# Altium PCB 180222.PcbDoc (part 5 of 5)
Units mil, origin at the board's own origin, x right, y up, seen from the top; angles counter-clockwise.
Board outline 6880.23 x 4505.03 mil, 2 copper layers (Top Layer, Bottom Layer); 136 components, 176 nets, 656 pads, 225 vias.
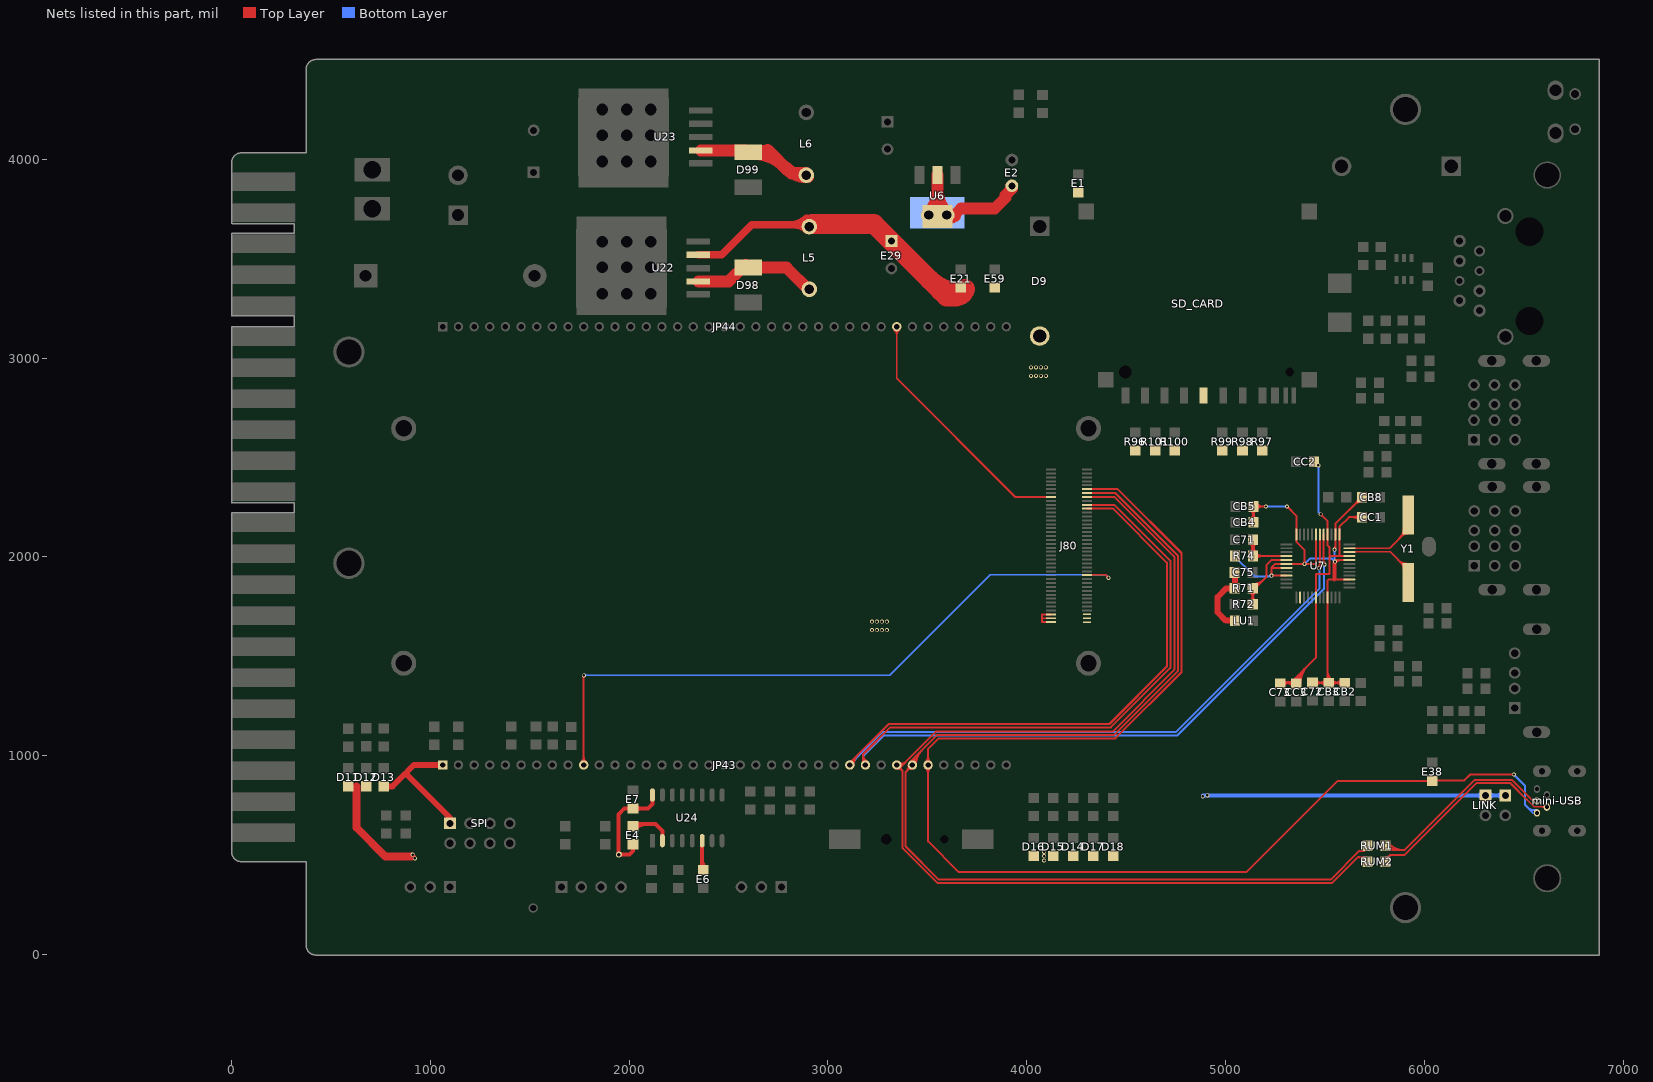
[diagram p5: the nets of this part, all layers, seen from the top]

## Via types
v1: diameter 20, hole 12, Top Layer to Bottom Layer, 169 vias
v2: diameter 30, hole 18, Top Layer to Bottom Layer, 30 vias
v3: diameter 35, hole 20, Top Layer to Bottom Layer, 25 vias
v4: diameter 50, hole 28, Top Layer to Bottom Layer, 1 vias

## Nets (pads, with @x,y where several pads share a name; then routed paths per layer and width w, separated by ;. In a path a pad name is that pad's centre, name@x,y a point inside that pad or via, vN(x,y) a via of type N, cw(c..) or ccw(c..) an arc to the next point about the centre after c; other vN are vias at no path point) (continued)
TDO: J80.13 JP43.10 | length 3880.1
  Top Layer w7: J80.13@4303.55,1910.36 4395.64,1910.36 4396,1910 4397,1910 v1(4412,1895) ; 4329.27,1909.36 ccw(c4329.27,1902.33) 4324.3,1907.3 cw(c4331.69,1899.91) 4331.69,1910.36 ; 4400.9,1906.1 cw(c4389.81,1895) 4405.5,1895 ccw(c4389.81,1895) 4400.9,1906.1 ; 4400.9,1906.1 ccw(c4412,1917.19) 4412,1901.5 cw(c4412,1917.19) 4400.9,1906.1
  Top Layer w10: v1@1769.22,1401.46 cw(c1762.38,1394.62) 1772.05,1394.62 ; JP43.10@1772.05,953.64 v1@1772.05,1406 ; 1772.05,1391.24 cw(c1786.52,1391.24) v1@1776.29,1401.46 ; JP43.10@1758.89,966.81 ccw(c1727.1,998.6) 1772.05,998.6 ; JP43.10@1758.89,966.81 ccw(c1727.1,998.6) 1772.05,998.6 ; JP43.10@1758.89,966.81 ccw(c1727.1,998.6) 1772.05,998.6 ; 1772.05,998.6 ccw(c1817.01,998.6) JP43.10@1785.22,966.81 ; 1772.05,998.6 ccw(c1817.01,998.6) JP43.10@1785.22,966.81 ; 1772.05,998.6 ccw(c1817.01,998.6) JP43.10@1785.22,966.81 ; v1@1767.78,1402.46 cw(c1757.46,1392.14) 1772.05,1392.14 ccw(c1757.46,1392.14) v1@1767.78,1402.46 ; v1@1772.05,1395.72 cw(c1781.6,1395.72) 1774.85,1402.46 ccw(c1781.6,1395.72) v1@1772.05,1395.72
  Bottom Layer w7: v1@1771.76,1402 1772.76,1401 v1@1776.76,1405 ; v1@1772.05,1406 3311,1406 3816,1911 4398,1911 4407,1902 v1@4407,1899 ; v1@1777.35,1400.4 cw(c1790.86,1386.89) 1790.86,1406 ; v1@1777.35,1409.6 ccw(c1786.03,1418.28) 1786.03,1406 ; 1787.01,1406 cw(c1787.01,1421.69) 1775.91,1410.6 ccw(c1787.01,1421.69) 1787.01,1406 ; 1787.01,1406 ccw(c1787.01,1390.31) 1775.91,1401.4 cw(c1787.01,1390.31) 1787.01,1406 ; 4399.49,1909.51 cw(c4384.98,1895) 4405.5,1895 ccw(c4384.98,1895) 4399.49,1909.51 ; 4404.32,1904.68 ccw(c4412,1912.36) 4412,1901.5 cw(c4412,1912.36) 4404.32,1904.68
  other v1: 1772.76,1405
TESTJ: U7.2
TMS: J80.48 JP44.30 | length 1663.4
  Top Layer w7: 3346.86,2898.14 JP44.30@3346.86,3149 ; J80.48@4122.39,2302 J80.48@4122.45,2302.06 ; JP44.30@3332.63,3144.13 cw(c3298.28,3109.78) 3346.86,3109.78 ; JP44.30@3332.63,3144.13 cw(c3298.28,3109.78) 3346.86,3109.78 ; JP44.30@3332.63,3144.13 cw(c3298.28,3109.78) 3346.86,3109.78 ; JP44.30@3337.58,3149.08 cw(c3315.18,3126.68) 3346.86,3126.68 ; JP44.30@3337.58,3149.08 cw(c3315.18,3126.68) 3346.86,3126.68 ; JP44.30@3337.58,3149.08 cw(c3315.18,3126.68) 3346.86,3126.68 ; 3346.86,3109.78 cw(c3395.44,3109.78) JP44.30@3361.09,3144.13 ; 3346.86,3109.78 cw(c3395.44,3109.78) JP44.30@3361.09,3144.13 ; 3346.86,3109.78 cw(c3395.44,3109.78) JP44.30@3361.09,3144.13 ; 3346.86,3126.68 cw(c3378.54,3126.68) JP44.30@3356.14,3149.08 ; 3346.86,3126.68 cw(c3378.54,3126.68) JP44.30@3356.14,3149.08 ; 3346.86,3126.68 cw(c3378.54,3126.68) JP44.30@3356.14,3149.08 ; 4096.58,2301 ccw(c4096.58,2308.25) 4101.7,2303.12 cw(c4096.58,2308.25) 4096.58,2301
  Top Layer w10: 3346.86,2898.14 3944,2301 J80.48@4122.39,2301
U22_2: D98.2 L5.2 U22.2 | length 621.2
  Top Layer w59.06: U22.2@2349.3,3386.07 2502.07,3386.07 D98.2@2586,3470 ; D98.2@2600,3456.22 2791.78,3456.22 L5.2@2903.5,3344.5
U23_2: D99.2 L6.2 U23.2 | length 1996.6
  Top Layer w59.06: U23.2@2360.3,4045.07 2586.93,4045.07 2588,4044 2697,4044 ; D99.2@2633.66,4027.29 cw(c2672.2,3943.95) 2737.12,4008.88 ; 2697,4049 2817,3929 ; 2783.02,3957.98 ccw(c2900,4074.97) L6.2@2900,3909.53 ; 2783.02,3965.98 ccw(c2900,4082.97) L6.2@2900,3917.53 ; 2783.33,3962.67 ccw(c2629.53,3808.87) D99.2@2629.53,4026.38 ; 2817,3931 L6.2@2892,3931 ; 2844.19,3931 cw(c2844.19,3873.23) L6.2@2885.04,3914.08 ; L6.2@2862,3920 L6.2@2901,3920 ; 2525.34,4045.07 cw(c2525.34,3991.09) D99.2@2563.51,4029.26 ; 2525.34,4045.07 cw(c2525.34,3991.09) D99.2@2563.51,4029.26 ; 2525.34,4045.07 cw(c2525.34,3991.09) D99.2@2563.51,4029.26 ; D99.2@2629.53,4026.38 cw(c2629.53,3820.94) 2774.79,3966.21 ccw(c2629.53,3820.94) D99.2@2629.53,4026.38 ; D99.2@2636.49,4029.26 cw(c2672.07,3993.68) 2672.07,4044 ; D99.2@2636.49,4029.26 cw(c2672.07,3993.68) 2672.07,4044 ; D99.2@2636.49,4029.26 cw(c2672.07,3993.68) 2672.07,4044 ; D99.2@2633.2,4027.09 cw(c2668.24,3939.99) 2734.62,4006.38 ccw(c2668.24,3939.99) D99.2@2633.2,4027.09
USB_5V: 
USBD_DN: J80.33 JP43.30 RUM2.2 | length 6130.5
  Top Layer w7: JP43.30@3345,952 3348.49,952 JP43.30@3346.86,953.64
  Top Layer w10: J80.33@4303.55,2302.06 4360.91,2302.06 4360.97,2302 4441,2302 4745,1998 4745,1434.25 4432.75,1122 3543.58,1122 3389.97,968.39 3389.97,966.98 ; 5666.23,489.77 5535.96,359.5 3552.09,359.5 3375,536.59 3375,925.49 ; 5678.65,490 cw(c5678.65,463.48) RUM2.2@5704.88,467.41 ; RUM2.2@5690.27,490 cw(c5690.27,465.22) RUM2.2@5714.77,468.9 ; RUM2.2@5694.99,465.93 ccw(c5667.04,461.74) 5667.04,490 5704,490 RUM2.2@5705,489 ; JP43.30@3363.33,944.96 cw(c3374.99,938.82) 3374.99,952 ; JP43.30@3363.33,944.96 cw(c3374.99,938.82) 3374.99,952 ; JP43.30@3363.33,944.96 cw(c3374.99,938.82) 3374.99,952 ; JP43.30@3364.52,959.54 ccw(c3375,963.05) 3375,952 ; JP43.30@3364.52,959.54 ccw(c3375,963.05) 3375,952 ; JP43.30@3364.52,959.54 ccw(c3375,963.05) 3375,952 ; 3375,925.5 cw(c3398.49,948.98) 3365.4,951.97 ccw(c3398.49,948.98) 3375,925.5 ; 3375,925.5 ccw(c3351.51,902.01) 3348.53,935.09 cw(c3351.51,902.01) 3375,925.5 ; 3375,925.49 3348.49,952 3375,952 ; 3375,952 3389.97,966.98 ; 3389.97,966.98 cw(c3374.91,982.04) 3359.94,966.89 ccw(c3374.91,982.04) 3389.97,966.98 ; JP43.30@3345.89,952.66 ccw(c3360.77,967.72) 3375.74,952.75 cw(c3360.77,967.72) JP43.30@3345.89,952.66 ; JP43.30@3352.92,959.77 ccw(c3367.84,974.88) 3382.86,959.86 cw(c3367.84,974.88) JP43.30@3352.92,959.77
USBD_DN1: mini-USB.2 RUM2.1 | length 1216.2
  Top Layer w8: 6519,777 6553,743 mini-USB.2@6613,743 ; 6588.64,743 cw(c6588.64,714.64) 6608.69,734.69 ccw(c6588.64,714.64) 6588.64,743 ; 6588.64,743 ccw(c6588.64,771.36) 6608.69,751.31 cw(c6588.64,771.36) 6588.64,743
  Top Layer w10: RUM2.1@5816,489 5827,500 ; 6516.86,779.14 6434,862 6262,862 5900,500 5827,500 ; RUM2.1@5805.91,489.57 ccw(c5805.91,515.33) 5824.12,497.12 ; RUM2.1@5805.91,489.57 ccw(c5805.91,515.33) 5824.12,497.12 ; RUM2.1@5805.91,489.57 ccw(c5805.91,515.33) 5824.12,497.12 ; RUM2.1@5823.97,478.87 cw(c5839.59,487.41) 5827,500 ; RUM2.1@5823.97,478.87 cw(c5839.59,487.41) 5827,500 ; RUM2.1@5823.97,478.87 cw(c5839.59,487.41) 5827,500
USBD_DP: J80.34 JP43.31 RUM1.2 | length 5959.2
  Top Layer w7: JP43.31@3424,951 JP43.31@3424,952.04 ; JP43.31@3424,953.64 JP43.31@3424,952.04 ; JP43.31@3425.6,953.64 JP43.31@3424,952.04
  Top Layer w10: JP43.31@3414.22,953.64 cw(c3450.33,953.64) 3424.8,979.17 ; JP43.31@3424.22,953.64 cw(c3484.47,953.64) 3441.87,996.24 ; JP43.31@3425,952 3424,951 3393,920 3393,919 3392,918 3392,543.63 3559.13,376.5 3560.13,377.5 5529.5,377.5 5674,522 5684,522 ; 3425,979.38 3550.62,1105 4439.79,1105 4762,1427.21 4762,2005.04 4445.29,2321.75 J80.34@4303.55,2321.75 ; JP43.31@3425.6,953.64 3425.6,977.6 3426.19,978.19 ; JP43.31@3434.22,953.64 cw(c3518.61,953.64) 3458.94,1013.31 ; JP43.31@3444.22,953.64 cw(c3552.76,953.64) 3476.01,1030.39 ; 5675,522 5697,522 RUM1.2@5702,527 ; 3393.52,920.52 ccw(c3361.04,953.01) 3406.98,953.46 cw(c3361.04,953.01) 3393.52,920.52 ; 3395.58,922.58 cw(c3425.6,892.57) 3425.6,935.02 ccw(c3425.6,892.57) 3395.58,922.58
USBD_DP1: mini-USB.3 RUM1.1 | length 1220.5
  Top Layer w10: RUM1.1@5798.83,540.81 ccw(c5833.74,571.45) 5833.74,525 ; RUM1.1@5806.35,547.4 ccw(c5855.83,590.83) 5855.83,525 ; RUM1.1@5813.87,554 ccw(c5877.91,610.22) 5877.91,525 ; RUM1.1@5821,525 5900,525 ; RUM1.1@5821.38,560.6 ccw(c5899.99,629.6) 5899.99,525 ; 6080,705 5900,525 ; 6080,705.41 6253.59,879 6441.04,879 6546.04,774 mini-USB.3@6565,774 ; 6545.63,774 ccw(c6545.63,789.87) mini-USB.3@6558.37,780.41 ; 6545.63,775 cw(c6545.63,759.13) mini-USB.3@6558.37,768.59
USBD_VBUS: E38.1 J80.35 JP43.32 mini-USB.1 | length 7024.8
  Top Layer w7: JP43.32@3503,950 JP43.32@3503,953.64 ; J80.35@4303.55,2340.43 J80.35@4304,2340.43
  Top Layer w10: J80.35@4304,2341 4458,2341 4779,2020 4779,1420.17 4446.83,1088 3557.66,1088 3504.34,1034.67 JP43.32@3504.34,953.64 3504.34,569.66 3659,415 5105,415 5564.09,874.09 E38.1@6040,874.09 ; E38.1@6046,876 6202,876 6232,906 v1(6451,906) ; JP43.32@3491.17,940.47 cw(c3459.38,908.68) 3504.34,908.68 ; JP43.32@3491.17,940.47 cw(c3459.38,908.68) 3504.34,908.68 ; JP43.32@3491.17,940.47 cw(c3459.38,908.68) 3504.34,908.68 ; JP43.32@3491.17,966.81 ccw(c3459.38,998.6) 3504.34,998.6 ; JP43.32@3491.17,966.81 ccw(c3459.38,998.6) 3504.34,998.6 ; JP43.32@3491.17,966.81 ccw(c3459.38,998.6) 3504.34,998.6 ; 3504.34,908.68 cw(c3549.29,908.68) JP43.32@3517.5,940.47 ; 3504.34,908.68 cw(c3549.29,908.68) JP43.32@3517.5,940.47 ; 3504.34,908.68 cw(c3549.29,908.68) JP43.32@3517.5,940.47 ; 3504.34,998.6 ccw(c3549.29,998.6) JP43.32@3517.5,966.81 ; 3504.34,998.6 ccw(c3549.29,998.6) JP43.32@3517.5,966.81 ; 3504.34,998.6 ccw(c3549.29,998.6) JP43.32@3517.5,966.81
  Bottom Layer w10: v1(6451,906) 6507,850 6507,753 6547,713 ; 6518.97,741.03 ccw(c6554.38,776.44) mini-USB.1@6564.77,727.45
USBH_DN: J80.31 JP43.28 U7.29 | length 6142.1
  Top Layer w7: JP43.28@3186.37,950.63 JP43.28@3187,950 ; J80.31@4303.55,2262.69 J80.31@4304.24,2262
  Top Layer w10: 3177,989.36 ccw(c3209.26,989.36) JP43.28@3193.57,961.17 ; JP43.28@3187,951 3177,961 3177,1006.37 ; JP43.28@3198.43,969.91 cw(c3218.73,1006.37) 3177,1006.37 ; 4373.31,2262.69 J80.31@4303.55,2262.69 4441.31,2262.69 4723,1981 4723,1442 4424,1143 3313.63,1143 3177,1006.37 ; v1@5494.41,1962.41 U7.29@5494.41,2113.81 ; 5494.41,1984.14 ccw(c5520.14,1984.14) 5501.94,1965.94 cw(c5520.14,1984.14) 5494.41,1984.14
  Bottom Layer w7: JP43.28@3183.36,953.64 JP43.28@3189.38,953.64 ; v1@5493,1960 v1@5493,1962.41
  Bottom Layer w10: 3177,983.26 ccw(c3199.78,983.26) JP43.28@3192.23,961.77 ; JP43.28@3189.38,953.64 3177,966.01 3177,997.37 ; JP43.28@3195.54,971.21 cw(c3204.73,997.37) 3177,997.37 ; v1@5496,1960 5496,1840.96 4756.54,1101.5 3281.13,1101.5 3177,997.37 ; 5496,1944.52 cw(c5516.3,1944.52) 5501.94,1958.87 ccw(c5516.3,1944.52) 5496,1944.52
  other v1: 5498.41,1962.41
USBH_DP: J80.30 JP43.27 U7.30 | length 6518.6
  Top Layer w10: JP43.27@3110,953 3110,963.88 3306.12,1160 4416.96,1160 4706,1449.04 4706,1972 4434.99,2243.01 J80.30@4303.55,2243.01 ; v1@5474.72,1944 U7.30@5474.72,2113.81 ; JP43.27@3110.64,972.26 ccw(c3110.64,992.08) 3124.65,978.06 ; JP43.27@3110.64,972.26 ccw(c3110.64,992.08) 3124.65,978.06 ; JP43.27@3110.64,972.26 ccw(c3110.64,992.08) 3124.65,978.06 ; JP43.27@3119.26,953.64 cw(c3165.21,953.64) 3132.72,986.13 ; JP43.27@3119.26,953.64 cw(c3165.21,953.64) 3132.72,986.13 ; JP43.27@3119.26,953.64 cw(c3165.21,953.64) 3132.72,986.13 ; JP43.27@3129.26,953.64 cw(c3199.35,953.64) 3149.79,1003.2 ; JP43.27@3129.26,953.64 cw(c3199.35,953.64) 3149.79,1003.2 ; JP43.27@3129.26,953.64 cw(c3199.35,953.64) 3149.79,1003.2 ; v1@5467.35,1947.54 ccw(c5449.53,1965.35) 5474.72,1965.35 cw(c5449.53,1965.35) v1@5467.35,1947.54
  Bottom Layer w10: JP43.27@3110.64,953.64 3110.64,955.52 3273.62,1118.5 4749.5,1118.5 5474,1843 5474,1945 v1@5473,1946 ; JP43.27@3110.64,972.26 ccw(c3110.64,1012.67) 3139.21,984.1 ; JP43.27@3110.64,972.26 ccw(c3110.64,1012.67) 3139.21,984.1 ; JP43.27@3110.64,972.26 ccw(c3110.64,1012.67) 3139.21,984.1 ; JP43.27@3119.26,953.64 cw(c3144.62,953.64) 3126.69,971.57 ; JP43.27@3119.26,953.64 cw(c3144.62,953.64) 3126.69,971.57 ; JP43.27@3119.26,953.64 cw(c3144.62,953.64) 3126.69,971.57 ; JP43.27@3129.26,953.64 cw(c3178.76,953.64) 3143.76,988.64 ; JP43.27@3129.26,953.64 cw(c3178.76,953.64) 3143.76,988.64 ; JP43.27@3129.26,953.64 cw(c3178.76,953.64) 3143.76,988.64 ; v1@5467.35,1940.46 cw(c5451.28,1924.4) 5474,1924.4 ccw(c5451.28,1924.4) v1@5467.35,1940.46
  other v1: 5470.88,1944
V18: C73.1 CC1.1 CC2.1 CC3.1 U7.6 U7.21 U7.25 U7.28 | length 3501.6
  Top Layer w10: C73.1@5280,1370 CC3.1@5331,1370 ; v1(5479,2215) 5514.09,2179.91 U7.28@5514.09,2113.81 5514.09,2058.91 5523,2050 5523,2003 ; 5523,2004.56 5523,2003 ; 5573.15,2005.71 U7.25@5573.15,2113.81 5573.15,2151.15 5622,2200 CC1.1@5687.09,2200 ; U7.21@5623.35,2004.56 5524.56,2004.56 5523,2003 ; C73.1@5285.4,1357.47 cw(c5310.76,1338.07) 5310.76,1370 ; C73.1@5285.4,1357.47 cw(c5310.76,1338.07) 5310.76,1370 ; C73.1@5285.4,1357.47 cw(c5310.76,1338.07) 5310.76,1370 ; C73.1@5290.59,1370 cw(c5290.59,1299.48) CC3.1@5340.46,1349.35 ; C73.1@5290.59,1370 cw(c5290.59,1299.48) CC3.1@5340.46,1349.35 ; C73.1@5290.59,1370 cw(c5290.59,1299.48) CC3.1@5340.46,1349.35 ; C73.1@5291.54,1378.47 ccw(c5311.98,1398.9) 5311.98,1370 ; C73.1@5291.54,1378.47 ccw(c5311.98,1398.9) 5311.98,1370 ; C73.1@5291.54,1378.47 ccw(c5311.98,1398.9) 5311.98,1370 ; C73.1@5293.34,1351.39 cw(c5331,1322.59) CC3.1@5331,1370 ; C73.1@5293.34,1351.39 cw(c5331,1322.59) CC3.1@5331,1370 ; C73.1@5293.34,1351.39 cw(c5331,1322.59) CC3.1@5331,1370 ; 5314.74,1370 cw(c5314.74,1323.63) CC3.1@5347.53,1356.42 ; 5314.74,1370 cw(c5314.74,1323.63) CC3.1@5347.53,1356.42 ; 5314.74,1370 cw(c5314.74,1323.63) CC3.1@5347.53,1356.42 ; 5320.02,1370 ccw(c5320.02,1398.9) CC3.1@5340.46,1378.47 ; 5320.02,1370 ccw(c5320.02,1398.9) CC3.1@5340.46,1378.47 ; 5320.02,1370 ccw(c5320.02,1398.9) CC3.1@5340.46,1378.47 ; CC3.1@5331,1370 5455.04,1494.04 U7.6@5455.04,1796.89 5455.04,1914 5523,1914 5523,2003 ; CC3.1@5347.58,1363.91 cw(c5402.3,1363.91) 5363.61,1402.61 ; CC3.1@5347.58,1363.91 cw(c5402.3,1363.91) 5363.61,1402.61 ; CC3.1@5347.58,1363.91 cw(c5402.3,1363.91) 5363.61,1402.61 ; CC3.1@5357.58,1363.91 cw(c5436.45,1363.91) 5380.68,1419.68 ; CC3.1@5357.58,1363.91 cw(c5436.45,1363.91) 5380.68,1419.68 ; CC3.1@5357.58,1363.91 cw(c5436.45,1363.91) 5380.68,1419.68 ; CC3.1@5367.58,1363.91 cw(c5470.59,1363.91) 5397.75,1436.75 ; CC3.1@5367.58,1363.91 cw(c5470.59,1363.91) 5397.75,1436.75 ; CC3.1@5367.58,1363.91 cw(c5470.59,1363.91) 5397.75,1436.75 ; CC3.1@5377.58,1363.91 cw(c5504.73,1363.91) 5414.82,1453.82 ; CC3.1@5377.58,1363.91 cw(c5504.73,1363.91) 5414.82,1453.82 ; CC3.1@5377.58,1363.91 cw(c5504.73,1363.91) 5414.82,1453.82 ; v1@5479,2210 cw(c5479,2197.93) 5487.54,2206.46 ; v1@5479,2210 cw(c5479,2197.93) 5487.54,2206.46 ; v1@5479,2210 cw(c5479,2197.93) 5487.54,2206.46 ; v1@5484,2215 ccw(c5496.07,2215) 5487.54,2206.46 ; v1@5484,2215 ccw(c5496.07,2215) 5487.54,2206.46 ; v1@5484,2215 ccw(c5496.07,2215) 5487.54,2206.46 ; 5637.38,2200 cw(c5637.38,2150.29) CC1.1@5672.53,2185.44 ; 5637.38,2200 ccw(c5637.38,2249.71) CC1.1@5672.53,2214.56 ; 5637.38,2200 cw(c5637.38,2150.29) CC1.1@5672.53,2185.44 ; 5637.38,2200 ccw(c5637.38,2249.71) CC1.1@5672.53,2214.56 ; 5637.38,2200 ccw(c5637.38,2249.71) CC1.1@5672.53,2214.56 ; 5637.38,2200 cw(c5637.38,2150.29) CC1.1@5672.53,2185.44
  Bottom Layer w10: v1(5467.91,2461.09) 5467.91,2226.09 v1(5479,2215) ; v1@5464.37,2457.56 cw(c5455.83,2449.02) 5467.91,2449.02 ; v1@5464.37,2457.56 cw(c5455.83,2449.02) 5467.91,2449.02 ; v1@5464.37,2457.56 cw(c5455.83,2449.02) 5467.91,2449.02 ; 5467.91,2449.02 cw(c5479.98,2449.02) v1@5471.44,2457.56 ; 5467.91,2449.02 cw(c5479.98,2449.02) v1@5471.44,2457.56 ; 5467.91,2449.02 cw(c5479.98,2449.02) v1@5471.44,2457.56
V33: C72.1 CB2.1 CB3.1 CB4.1 CB5.1 CB8.1 R74.2 U7.9 U7.15 U7.20 U7.26 U7.31 U7.36 U7.42 U7.43 U7.45 | length 6238.2
  Top Layer w10: v1(5043,2006) 5033.04,2006 5033.04,2005 R74.2@5048.35,2005 ; CB4.1@5140.91,2174 CB5.1@5140.91,2254 v1(5203,2254) ; U7.43@5293,1945 5234,1945 5232,1947 ; U7.45@5306.42,1906.14 v1(5232,1906.14) 5232,1947 ; v1(5310,2254) 5356.61,2207.39 U7.36@5356.61,2113.81 5356.61,2076.39 5398,2035 v1(5398,1965.19) ; C72.1@5438,1367.91 CB2.1@5599,1367.91 ; U7.31@5455.04,2113.81 5455.04,1965.19 v1(5398,1965.19) ; CB3.1@5514.09,1367 U7.9@5514.09,1796.89 5514.09,1883 5517.55,1886.45 5547.45,1886.45 ; 5548,1886.45 5550.45,1886.45 ; v1@5548,1973 v1(5551.12,1976.12) 5559.88,1984.88 U7.20@5623.35,1984.88 ; v1@5548,2037.07 5553.46,2042.54 U7.26@5553.46,2113.81 5553.46,2166.37 CB8.1@5687.09,2300 ; 5550,1886 5550.45,1886.45 ; U7.15@5623.35,1886.45 5550.45,1886.45 ; CB4.1@5126.35,2189.54 ccw(c5091.2,2224.69) 5140.91,2224.69 ; CB4.1@5126.35,2189.54 ccw(c5091.2,2224.69) 5140.91,2224.69 ; CB4.1@5126.35,2189.54 ccw(c5091.2,2224.69) 5140.91,2224.69 ; CB5.1@5126.35,2238.46 cw(c5091.2,2203.3) 5140.91,2203.3 ; CB5.1@5126.35,2238.46 cw(c5091.2,2203.3) 5140.91,2203.3 ; CB5.1@5126.35,2238.46 cw(c5091.2,2203.3) 5140.91,2203.3 ; 5140.91,2203.3 cw(c5190.62,2203.3) CB5.1@5155.47,2238.46 ; 5140.91,2203.3 cw(c5190.62,2203.3) CB5.1@5155.47,2238.46 ; 5140.91,2203.3 cw(c5190.62,2203.3) CB5.1@5155.47,2238.46 ; 5140.91,2224.69 ccw(c5190.62,2224.69) CB4.1@5155.47,2189.54 ; 5140.91,2224.69 ccw(c5190.62,2224.69) CB4.1@5155.47,2189.54 ; 5140.91,2224.69 ccw(c5190.62,2224.69) CB4.1@5155.47,2189.54 ; CB5.1@5155.47,2239.44 cw(c5190.62,2204.29) 5190.62,2254 ; CB5.1@5155.47,2239.44 cw(c5190.62,2204.29) 5190.62,2254 ; CB5.1@5155.47,2239.44 cw(c5190.62,2204.29) 5190.62,2254 ; CB5.1@5155.47,2268.56 ccw(c5190.62,2303.71) 5190.62,2254 ; CB5.1@5155.47,2268.56 ccw(c5190.62,2303.71) 5190.62,2254 ; CB5.1@5155.47,2268.56 ccw(c5190.62,2303.71) 5190.62,2254 ; 5190.93,2254 cw(c5190.93,2241.93) v1@5199.46,2250.46 ; 5190.93,2254 ccw(c5190.93,2266.07) v1@5199.46,2257.54 ; 5190.93,2254 cw(c5190.93,2241.93) v1@5199.46,2250.46 ; 5190.93,2254 ccw(c5190.93,2266.07) v1@5199.46,2257.54 ; 5190.93,2254 ccw(c5190.93,2266.07) v1@5199.46,2257.54 ; 5190.93,2254 cw(c5190.93,2241.93) v1@5199.46,2250.46 ; 5232,1918.21 cw(c5219.93,1918.21) 5228.46,1909.67 ccw(c5219.93,1918.21) 5232,1918.21 ; 5232,1918.21 ccw(c5244.07,1918.21) v1@5235.54,1909.67 ; 5232,1918.21 ccw(c5244.07,1918.21) v1@5235.54,1909.67 ; 5232,1947 5250.19,1965.19 U7.42@5306.42,1965.19 v1(5398,1965.19) ; v1@5235.54,1902.6 cw(c5244.07,1894.07) 5244.07,1906.14 ; v1@5235.54,1902.6 cw(c5244.07,1894.07) 5244.07,1906.14 ; v1@5235.54,1902.6 cw(c5244.07,1894.07) 5244.07,1906.14 ; v1@5235.54,1909.67 ccw(c5244.07,1918.21) 5244.07,1906.14 ; v1@5235.54,1909.67 ccw(c5244.07,1918.21) 5244.07,1906.14 ; v1@5235.54,1909.67 ccw(c5244.07,1918.21) 5244.07,1906.14 ; v1@5310,2249 cw(c5310,2236.93) 5318.54,2245.46 ; v1@5310,2249 cw(c5310,2236.93) 5318.54,2245.46 ; v1@5310,2249 cw(c5310,2236.93) 5318.54,2245.46 ; v1@5315,2254 ccw(c5327.07,2254) 5318.54,2245.46 ; v1@5315,2254 ccw(c5327.07,2254) 5318.54,2245.46 ; v1@5315,2254 ccw(c5327.07,2254) 5318.54,2245.46 ; 5385.93,1965.19 cw(c5385.93,1953.12) v1@5394.46,1961.66 ; 5385.93,1965.19 ccw(c5385.93,1977.26) v1@5394.46,1968.73 ; 5385.93,1965.19 cw(c5385.93,1953.12) v1@5394.46,1961.66 ; 5385.93,1965.19 ccw(c5385.93,1977.26) v1@5394.46,1968.73 ; 5385.93,1965.19 ccw(c5385.93,1977.26) v1@5394.46,1968.73 ; 5385.93,1965.19 cw(c5385.93,1953.12) v1@5394.46,1961.66 ; v1@5394.46,1968.73 ccw(c5385.93,1977.26) 5398,1977.26 ; v1@5394.46,1968.73 ccw(c5385.93,1977.26) 5398,1977.26 ; v1@5394.46,1968.73 ccw(c5385.93,1977.26) 5398,1977.26 ; 5398,1977.26 ccw(c5410.07,1977.26) v1@5401.54,1968.73 ; 5398,1977.26 ccw(c5410.07,1977.26) v1@5401.54,1968.73 ; 5398,1977.26 ccw(c5410.07,1977.26) v1@5401.54,1968.73 ; v1@5401.54,1961.66 cw(c5410.07,1953.12) 5410.07,1965.19 ; v1@5401.54,1961.66 cw(c5410.07,1953.12) 5410.07,1965.19 ; v1@5401.54,1961.66 cw(c5410.07,1953.12) 5410.07,1965.19 ; v1@5401.54,1968.73 ccw(c5410.07,1977.26) 5410.07,1965.19 ; v1@5401.54,1968.73 ccw(c5410.07,1977.26) 5410.07,1965.19 ; v1@5401.54,1968.73 ccw(c5410.07,1977.26) 5410.07,1965.19 ; C72.1@5453.54,1353.35 cw(c5488.69,1318.2) 5488.69,1367.91 ; C72.1@5453.54,1353.35 cw(c5488.69,1318.2) 5488.69,1367.91 ; C72.1@5453.54,1353.35 cw(c5488.69,1318.2) 5488.69,1367.91 ; C72.1@5453.54,1382.47 ccw(c5488.69,1417.62) 5488.69,1367.91 ; C72.1@5453.54,1382.47 ccw(c5488.69,1417.62) 5488.69,1367.91 ; C72.1@5453.54,1382.47 ccw(c5488.69,1417.62) 5488.69,1367.91 ; 5466.89,1367.91 cw(c5466.89,1314.78) CB3.1@5504.46,1352.35 ; 5466.89,1367.91 cw(c5466.89,1314.78) CB3.1@5504.46,1352.35 ; 5466.89,1367.91 cw(c5466.89,1314.78) CB3.1@5504.46,1352.35 ; 5471.72,1367.91 ccw(c5471.72,1414.2) CB3.1@5504.46,1381.47 ; 5471.72,1367.91 ccw(c5471.72,1414.2) CB3.1@5504.46,1381.47 ; 5471.72,1367.91 ccw(c5471.72,1414.2) CB3.1@5504.46,1381.47 ; 5491.03,1367.91 cw(c5491.03,1338.92) CB3.1@5511.53,1359.42 ; 5491.03,1367.91 cw(c5491.03,1338.92) CB3.1@5511.53,1359.42 ; 5491.03,1367.91 cw(c5491.03,1338.92) CB3.1@5511.53,1359.42 ; CB3.1@5504.46,1381.47 ccw(c5481.19,1404.73) 5514.09,1404.73 ; CB3.1@5504.46,1381.47 ccw(c5481.19,1404.73) 5514.09,1404.73 ; CB3.1@5504.46,1381.47 ccw(c5481.19,1404.73) 5514.09,1404.73 ; 5514.09,1404.36 ccw(c5556.47,1404.36) CB3.1@5526.51,1374.39 ; 5514.09,1404.36 ccw(c5556.47,1404.36) CB3.1@5526.51,1374.39 ; 5514.09,1404.36 ccw(c5556.47,1404.36) CB3.1@5526.51,1374.39 ; 5514.09,1428.5 ccw(c5580.61,1428.5) CB3.1@5533.58,1381.47 ; 5514.09,1428.5 ccw(c5580.61,1428.5) CB3.1@5533.58,1381.47 ; 5514.09,1428.5 ccw(c5580.61,1428.5) CB3.1@5533.58,1381.47 ; CB3.1@5528.47,1359.42 cw(c5548.97,1338.92) 5548.97,1367.91 ; CB3.1@5528.47,1359.42 cw(c5548.97,1338.92) 5548.97,1367.91 ; CB3.1@5528.47,1359.42 cw(c5548.97,1338.92) 5548.97,1367.91 ; CB3.1@5535.54,1352.35 cw(c5573.11,1314.78) 5573.11,1367.91 ; CB3.1@5535.54,1352.35 cw(c5573.11,1314.78) 5573.11,1367.91 ; CB3.1@5535.54,1352.35 cw(c5573.11,1314.78) 5573.11,1367.91 ; CB3.1@5535.54,1381.47 ccw(c5568.28,1414.2) 5568.28,1367.91 ; CB3.1@5535.54,1381.47 ccw(c5568.28,1414.2) 5568.28,1367.91 ; CB3.1@5535.54,1381.47 ccw(c5568.28,1414.2) 5568.28,1367.91 ; 5546.89,1367.91 cw(c5546.89,1314.78) CB2.1@5584.46,1352.35 ; 5546.89,1367.91 cw(c5546.89,1314.78) CB2.1@5584.46,1352.35 ; 5546.89,1367.91 cw(c5546.89,1314.78) CB2.1@5584.46,1352.35 ; 5551.72,1367.91 ccw(c5551.72,1414.2) CB2.1@5584.46,1381.47 ; 5551.72,1367.91 ccw(c5551.72,1414.2) CB2.1@5584.46,1381.47 ; 5551.72,1367.91 ccw(c5551.72,1414.2) CB2.1@5584.46,1381.47 ; 5571.03,1367.91 cw(c5571.03,1338.92) CB2.1@5591.53,1359.42 ; 5571.03,1367.91 cw(c5571.03,1338.92) CB2.1@5591.53,1359.42 ; 5571.03,1367.91 cw(c5571.03,1338.92) CB2.1@5591.53,1359.42 ; v1@5545.46,2040.61 ccw(c5526.15,2059.92) 5553.46,2059.92 cw(c5526.15,2059.92) v1@5545.46,2040.61 ; v1@5547.58,1979.66 cw(c5560.19,1967.05) 5560.19,1984.88 ccw(c5560.19,1967.05) v1@5547.58,1979.66 ; v1@5554.66,1972.58 cw(c5584.33,1942.9) 5584.33,1984.88 ccw(c5584.33,1942.9) v1@5554.66,1972.58 ; 5650.26,2263.17 cw(c5687.09,2226.34) 5687.09,2278.43 ccw(c5687.09,2226.34) 5650.26,2263.17 ; 5652.64,2265.55 ccw(c5619.17,2299.02) 5666.5,2299.02 cw(c5619.17,2299.02) 5652.64,2265.55 ; CB8.1@5667.33,2280.24 cw(c5687.09,2260.48) 5687.09,2288.43 ccw(c5687.09,2260.48) CB8.1@5667.33,2280.24
  Top Layer w20: 5547.45,1886.45 5549,1888 5549,1972 v1@5548,1973
  Bottom Layer w10: v1(5043,2006) 5147,1902 v1@5232,1902 ; v1(5203,2254) v1(5310,2254) ; v1(5398,1965.19) 5424.81,1992 5535.24,1992 v1@5549,1978.24 ; v1(5549,2037.07) v1@5549,1978.24 ; v1(5551.12,1976.12) v1@5549,1978.24 ; v1@5043,2001 cw(c5043,1988.93) 5051.54,1997.46 ; v1@5043,2001 cw(c5043,1988.93) 5051.54,1997.46 ; v1@5043,2001 cw(c5043,1988.93) 5051.54,1997.46 ; v1@5048,2006 ccw(c5060.07,2006) 5051.54,1997.46 ; v1@5048,2006 ccw(c5060.07,2006) 5051.54,1997.46 ; v1@5048,2006 ccw(c5060.07,2006) 5051.54,1997.46 ; v1@5206.54,2250.46 cw(c5215.07,2241.93) 5215.07,2254 ; v1@5206.54,2250.46 cw(c5215.07,2241.93) 5215.07,2254 ; v1@5206.54,2250.46 cw(c5215.07,2241.93) 5215.07,2254 ; v1@5206.54,2257.54 ccw(c5215.07,2266.07) 5215.07,2254 ; v1@5206.54,2257.54 ccw(c5215.07,2266.07) 5215.07,2254 ; v1@5206.54,2257.54 ccw(c5215.07,2266.07) 5215.07,2254 ; 5209.94,1902 ccw(c5209.94,1928.2) v1@5228.46,1909.67 ; 5209.94,1902 ccw(c5209.94,1928.2) v1@5228.46,1909.67 ; 5209.94,1902 ccw(c5209.94,1928.2) v1@5228.46,1909.67 ; 5297.93,2254 cw(c5297.93,2241.93) v1@5306.46,2250.46 ; 5297.93,2254 ccw(c5297.93,2266.07) v1@5306.46,2257.54 ; 5297.93,2254 cw(c5297.93,2241.93) v1@5306.46,2250.46 ; 5297.93,2254 ccw(c5297.93,2266.07) v1@5306.46,2257.54 ; 5297.93,2254 ccw(c5297.93,2266.07) v1@5306.46,2257.54 ; 5297.93,2254 cw(c5297.93,2241.93) v1@5306.46,2250.46 ; v1@5398,1970.19 ccw(c5398,1982.26) 5406.54,1973.73 ; v1@5398,1970.19 ccw(c5398,1982.26) 5406.54,1973.73 ; v1@5398,1970.19 ccw(c5398,1982.26) 5406.54,1973.73 ; v1@5403,1965.19 cw(c5415.07,1965.19) 5406.54,1973.73 ; v1@5403,1965.19 cw(c5415.07,1965.19) 5406.54,1973.73 ; v1@5403,1965.19 cw(c5415.07,1965.19) 5406.54,1973.73 ; 5542.58,1984.66 cw(c5534.05,1976.12) v1@5546.12,1976.12 ; 5542.58,1984.66 ccw(c5551.12,1993.19) v1@5551.12,1981.12 ; 5542.58,1984.66 cw(c5534.05,1976.12) v1@5546.12,1976.12 ; 5542.58,1984.66 ccw(c5551.12,1993.19) v1@5551.12,1981.12 ; 5542.58,1984.66 ccw(c5551.12,1993.19) v1@5551.12,1981.12 ; 5542.58,1984.66 cw(c5534.05,1976.12) v1@5546.12,1976.12 ; v1@5545.46,2033.54 cw(c5536.93,2025) 5549,2025 ; v1@5545.46,2033.54 cw(c5536.93,2025) 5549,2025 ; v1@5545.46,2033.54 cw(c5536.93,2025) 5549,2025 ; 5549,1993.31 ccw(c5568.31,1993.31) v1@5554.66,1979.66 ; 5549,1993.31 ccw(c5568.31,1993.31) v1@5554.66,1979.66 ; 5549,1993.31 ccw(c5568.31,1993.31) v1@5554.66,1979.66 ; 5549,2025 cw(c5561.07,2025) v1@5552.54,2033.54 ; 5549,2025 cw(c5561.07,2025) v1@5552.54,2033.54 ; 5549,2025 cw(c5561.07,2025) v1@5552.54,2033.54
V+: E4.1 U24.2 | length 288.1
  Top Layer w20: E4.1@2027.55,637.45 2047.09,657 ; E4.1@2031.97,656.97 ccw(c2039.52,664.58) 2047.09,657 ; E4.1@2032.01,634.88 cw(c2085.41,581.48) 2085.41,657 ; U24.2@2168,573 2168,622 2133,657 2047.09,657
V-: E6.1 U24.6 | length 201.2
  Top Layer w20: E6.1@2361.99,435.93 ccw(c2347.49,450.43) E6.1@2368,450.43 ; E6.1@2368,430.91 U24.6@2368,573 ; 2368,474.66 ccw(c2422.77,474.66) E6.1@2384.04,435.93
VBUS: C75.1 LU1.2 R71.2 | length 438.2
  Top Layer w30: C75.1@5046.09,1922 5047.35,1920.74 R71.2@5047.35,1842 5004,1842 4960,1798 4960,1722 5002,1680 LU1.2@5048.35,1680 ; C75.1@5038.61,1913.53 cw(c5017.48,1892.41) 5047.35,1892.41 ; C75.1@5038.61,1913.53 cw(c5017.48,1892.41) 5047.35,1892.41 ; C75.1@5038.61,1913.53 cw(c5017.48,1892.41) 5047.35,1892.41
VBUSM: R71.1 R72.1 U7.41 | length 1156.3
  Top Layer w10: R72.1@5137.91,1762 5137.91,1830.91 5206,1899 5206,1959 5231,1984 ; 5231,1985 U7.41@5295,1985 ; R72.1@5123.35,1777.54 ccw(c5088.2,1812.69) 5137.91,1812.69 ; R72.1@5123.35,1777.54 ccw(c5088.2,1812.69) 5137.91,1812.69 ; R72.1@5123.35,1777.54 ccw(c5088.2,1812.69) 5137.91,1812.69 ; R71.1@5123.35,1826.46 cw(c5088.2,1791.3) 5137.91,1791.3 ; R71.1@5123.35,1826.46 cw(c5088.2,1791.3) 5137.91,1791.3 ; R71.1@5123.35,1826.46 cw(c5088.2,1791.3) 5137.91,1791.3 ; 5137.91,1791.3 cw(c5187.62,1791.3) R71.1@5152.47,1826.46 ; 5137.91,1791.3 cw(c5187.62,1791.3) R71.1@5152.47,1826.46 ; 5137.91,1791.3 cw(c5187.62,1791.3) R71.1@5152.47,1826.46 ; 5137.91,1812.69 ccw(c5187.62,1812.69) R72.1@5152.47,1777.54 ; 5137.91,1812.69 ccw(c5187.62,1812.69) R72.1@5152.47,1777.54 ; 5137.91,1812.69 ccw(c5187.62,1812.69) R72.1@5152.47,1777.54 ; R71.1@5137.91,1853.57 ccw(c5137.91,1908.3) 5176.6,1869.6 ; R71.1@5137.91,1853.57 ccw(c5137.91,1908.3) 5176.6,1869.6 ; R71.1@5137.91,1853.57 ccw(c5137.91,1908.3) 5176.6,1869.6 ; R71.1@5137.91,1863.57 ccw(c5137.91,1942.44) 5193.67,1886.67 ; R71.1@5137.91,1863.57 ccw(c5137.91,1942.44) 5193.67,1886.67 ; R71.1@5137.91,1863.57 ccw(c5137.91,1942.44) 5193.67,1886.67 ; R71.1@5158.5,1842.98 cw(c5179.05,1842.98) 5164.52,1857.52 ; R71.1@5158.5,1842.98 cw(c5179.05,1842.98) 5164.52,1857.52 ; R71.1@5158.5,1842.98 cw(c5179.05,1842.98) 5164.52,1857.52
VCC: "J80.2 " D9.2 E21.2 E29.1@3320,3588.9 E59.2 J80.1 J80.3 J80.78 J80.79 J80.80 L5.1 U22.4 | length 3371.8
  Top Layer w10: J80.80@4122.45,1672.14 4077,1672.14 4077,1691.83 ; J80.79@4122.45,1691.83 4077,1691.83 ; J80.78@4122.45,1711.51 4077,1711.51 4077,1691.83
  Top Layer w39.37: U22.4@2349.3,3519.93 2465.93,3519.93 2617,3671 L5.1@2914,3671 ; 2837.75,3671 cw(c2837.75,3592.75) L5.1@2893.08,3648.08 ; 2815.3,3671 ccw(c2815.3,3779.7) 2892.16,3702.84 cw(c2815.3,3779.7) 2815.3,3671 ; 2834.61,3671 cw(c2834.61,3589.61) 2892.16,3647.16 ccw(c2834.61,3589.61) 2834.61,3671
  Top Layer w100: L5.1@2920,3675 3232,3675 3597,3310 3639,3310 ; 3511.74,3395.26 ccw(c3667.02,3550.54) E21.2@3667.02,3330.94 ; 3511.74,3395.26 ccw(c3667.02,3550.54) E21.2@3667.02,3330.94 ; 3511.74,3395.26 ccw(c3667.02,3550.54) E21.2@3667.02,3330.94 ; 3563.98,3343.02 ccw(c3626.89,3405.94) E21.2@3682.19,3336.23 ; 3563.98,3343.02 ccw(c3626.89,3405.94) E21.2@3682.19,3336.23 ; 3563.98,3343.02 ccw(c3626.89,3405.94) E21.2@3682.19,3336.23 ; 3616.45,3310 ccw(c3616.45,3405.92) E21.2@3684.28,3338.09 ; 3616.45,3310 ccw(c3616.45,3405.92) E21.2@3684.28,3338.09 ; 3616.45,3310 ccw(c3616.45,3405.92) E21.2@3684.28,3338.09 ; 3639,3310 ccw(c3639,3363.62) E21.2@3690.43,3348.45 ; 3639,3310 ccw(c3639,3363.62) E21.2@3690.43,3348.45 ; 3639,3310 ccw(c3639,3363.62) E21.2@3690.43,3348.45
  other v1: 3222,1632 3247,1632 3272,1632 3297,1632 3222,1675 3247,1675 3272,1675 3297,1675 4022,2911 4047,2911 4072,2911 4097,2911 4022,2954 4047,2954 4072,2954 4097,2954
VDD3_3: ?.1@6408,800 D11.1 D12.1 D13.1 D14.1 D15.1 D16.1 D17.1 D18.1 E1.1 E2.1 E4.2 E7.2 JP43.1 LINK.1 pad.2@3508,3720 pad.2@3598,3720 pad.3@1949,503 pad.5@3550,3732 R96.2 R97.2 R98.2 R99.2 R100.2 R101.2 SD_CARD.4 SPI.1 U6.2 U24.16 | length 6525.7
  Top Layer w20: v1@905,497 907,499 v1@913,499 ; pad.3@1947,505 1947,705 1978,736 E7.2@2016,736 ; 1947,519.9 ccw(c1965.9,519.9) pad.3@1952.54,506.54 ; pad.3@1949,503 2002,503 2019,520 E4.2@2019,554 ; E7.2@2016,735.35 E7.2@2020,735.35 2095.35,735.35 2118,758 U24.16@2118,803 ; E7.2@2032.01,724.33 cw(c2058.62,697.72) 2058.62,735.35 cw(c2058.62,772.99) E7.2@2032.01,746.38 ; D13.1@779.01,835.42 cw(c805.62,808.81) 805.62,846.45 ; D13.1@779.01,835.42 cw(c805.62,808.81) 805.62,846.45 ; D13.1@779.01,835.42 cw(c805.62,808.81) 805.62,846.45 ; D13.1@779.01,857.47 ccw(c805.62,884.09) 805.62,846.45 ; D13.1@779.01,857.47 ccw(c805.62,884.09) 805.62,846.45 ; D13.1@779.01,857.47 ccw(c805.62,884.09) 805.62,846.45
  Top Layer w30: D13.1@767,846.45 810.45,846.45 875.5,911.5 1100,687 SPI.1@1100,660 ; 886,922 918,954 JP43.1@1058,954
  Top Layer w40: 630,846 630,638 774,494 905,494
  Top Layer w59.06: U6.2@3551.2,3714.8 U6.2@3551.2,3921.75 ; U6.2@3625,3708 3670,3753 3840,3753 3893.8,3806.8 3893.8,3819.8 3926,3852 E2.1@3926,3867 ; U6.2@3501.04,3726.96 ccw(c3379.93,3848.07) 3551.2,3848.07 ; U6.2@3501.04,3726.96 ccw(c3379.93,3848.07) 3551.2,3848.07 ; U6.2@3501.04,3726.96 ccw(c3379.93,3848.07) 3551.2,3848.07 ; U6.2@3531.72,3732.57 ccw(c3484.67,3779.62) 3551.2,3779.62 ; U6.2@3531.72,3732.57 ccw(c3484.67,3779.62) 3551.2,3779.62 ; U6.2@3531.72,3732.57 ccw(c3484.67,3779.62) 3551.2,3779.62 ; U6.2@3542.8,3685.2 ccw(c3522.5,3705.5) U6.2@3551.2,3705.5 ; U6.2@3542.8,3685.2 ccw(c3522.5,3705.5) U6.2@3551.2,3705.5 ; U6.2@3542.8,3685.2 ccw(c3522.5,3705.5) U6.2@3551.2,3705.5 ; U6.2@3551.2,3714.16 ccw(c3592.16,3714.16) U6.2@3563.2,3685.2 ; U6.2@3551.2,3714.16 ccw(c3592.16,3714.16) U6.2@3563.2,3685.2 ; U6.2@3551.2,3714.16 ccw(c3592.16,3714.16) U6.2@3563.2,3685.2 ; 3551.2,3779.62 ccw(c3617.74,3779.62) U6.2@3570.69,3732.57 ; 3551.2,3779.62 ccw(c3617.74,3779.62) U6.2@3570.69,3732.57 ; 3551.2,3779.62 ccw(c3617.74,3779.62) U6.2@3570.69,3732.57 ; 3551.2,3856.74 ccw(c3734.74,3856.74) U6.2@3604.96,3726.96 ; 3551.2,3856.74 ccw(c3734.74,3856.74) U6.2@3604.96,3726.96 ; 3551.2,3856.74 ccw(c3734.74,3856.74) U6.2@3604.96,3726.96 ; U6.2@3588.41,3693.6 cw(c3639.58,3642.43) 3639.58,3714.8 ; U6.2@3588.41,3693.6 cw(c3639.58,3642.43) 3639.58,3714.8 ; U6.2@3588.41,3693.6 cw(c3639.58,3642.43) 3639.58,3714.8 ; U6.2@3588.41,3732.57 ccw(c3631.33,3775.49) pad.2@3631.33,3714.8 ; U6.2@3588.41,3732.57 ccw(c3631.33,3775.49) pad.2@3631.33,3714.8 ; U6.2@3588.41,3732.57 ccw(c3631.33,3775.49) pad.2@3631.33,3714.8 ; 3911.17,3837.17 ccw(c3881.35,3867) E2.1@3923.53,3867 ; 3911.17,3837.17 ccw(c3881.35,3867) E2.1@3923.53,3867 ; 3911.17,3837.17 ccw(c3881.35,3867) E2.1@3923.53,3867
  Bottom Layer w20: v1@4886,800 LINK.1@6308,800 ?.1@6379,800 ; v1(4886,796) cw(c4895.66,786.34) 4895.66,800 ; v1(4886,796) cw(c4895.66,786.34) 4895.66,800 ; v1(4886,796) cw(c4895.66,786.34) 4895.66,800 ; 6260.86,800 cw(c6260.86,752.86) LINK.1@6294.19,786.19 ; 6260.86,800 ccw(c6260.86,847.14) LINK.1@6294.19,813.81 ; 6260.86,800 cw(c6260.86,752.86) LINK.1@6294.19,786.19 ; 6260.86,800 ccw(c6260.86,847.14) LINK.1@6294.19,813.81 ; 6260.86,800 ccw(c6260.86,847.14) LINK.1@6294.19,813.81 ; 6260.86,800 cw(c6260.86,752.86) LINK.1@6294.19,786.19 ; LINK.1@6321.81,786.19 cw(c6355.14,752.86) 6355.14,800 ; LINK.1@6321.81,786.19 cw(c6355.14,752.86) 6355.14,800 ; LINK.1@6321.81,786.19 cw(c6355.14,752.86) 6355.14,800 ; LINK.1@6321.81,813.81 ccw(c6355.14,847.14) 6355.14,800 ; LINK.1@6321.81,813.81 ccw(c6355.14,847.14) 6355.14,800 ; LINK.1@6321.81,813.81 ccw(c6355.14,847.14) 6355.14,800 ; 6360.86,800 cw(c6360.86,752.86) ?.1@6394.19,786.19 ; 6360.86,800 ccw(c6360.86,847.14) ?.1@6394.19,813.81 ; 6360.86,800 cw(c6360.86,752.86) ?.1@6394.19,786.19 ; 6360.86,800 ccw(c6360.86,847.14) ?.1@6394.19,813.81 ; 6360.86,800 ccw(c6360.86,847.14) ?.1@6394.19,813.81 ; 6360.86,800 cw(c6360.86,752.86) ?.1@6394.19,786.19
  other v1: 4088,473 923,484 4088,495 912,503 4088,517 4909,801
VSS: 
XIN: U7.22 Y1.1 | length 969.7
  Top Layer w7: U7.22@5623.59,2025 U7.22@5624.59,2024 ; U7.22@5623.59,2026 5828,2026 5918,1936 Y1.1@5918,1935 ; 5863.66,1990.34 ccw(c5920.03,2046.7) Y1.1@5920.03,1966.99 ; 5863.66,1990.34 ccw(c5920.03,2046.7) Y1.1@5920.03,1966.99 ; 5863.66,1990.34 ccw(c5920.03,2046.7) Y1.1@5920.03,1966.99 ; 5875.61,1978.39 ccw(c5920.03,2022.8) Y1.1@5920.03,1959.99 ; 5875.61,1978.39 ccw(c5920.03,2022.8) Y1.1@5920.03,1959.99 ; 5875.61,1978.39 ccw(c5920.03,2022.8) Y1.1@5920.03,1959.99 ; 5880.54,1973.46 cw(c5848.05,1940.96) Y1.1@5894,1940.96 ; 5880.54,1973.46 cw(c5848.05,1940.96) Y1.1@5894,1940.96 ; 5880.54,1973.46 cw(c5848.05,1940.96) Y1.1@5894,1940.96 ; 5887.56,1966.44 ccw(c5920.03,1998.91) Y1.1@5920.03,1952.99 ; 5887.56,1966.44 ccw(c5920.03,1998.91) Y1.1@5920.03,1952.99 ; 5887.56,1966.44 ccw(c5920.03,1998.91) Y1.1@5920.03,1952.99 ; Y1.1@5892.49,1961.51 cw(c5871.95,1940.96) Y1.1@5901,1940.96 ; Y1.1@5892.49,1961.51 cw(c5871.95,1940.96) Y1.1@5901,1940.96 ; Y1.1@5892.49,1961.51 cw(c5871.95,1940.96) Y1.1@5901,1940.96 ; U7.22@5649.94,2023.24 cw(c5656.6,2016.59) 5656.6,2026 ccw(c5656.6,2016.59) U7.22@5649.94,2023.24
XOUT: U7.23 Y1.2 | length 940.1
  Top Layer w7: U7.23@5623.35,2043.93 5825.93,2043.93 Y1.2@5920,2138 ; 5872.68,2090.68 ccw(c5821.19,2142.17) Y1.2@5894,2142.17 ; 5872.68,2090.68 ccw(c5821.19,2142.17) Y1.2@5894,2142.17 ; 5872.68,2090.68 ccw(c5821.19,2142.17) Y1.2@5894,2142.17 ; 5882.66,2100.66 cw(c5920.03,2063.28) Y1.2@5920.03,2116.14 ; 5882.66,2100.66 cw(c5920.03,2063.28) Y1.2@5920.03,2116.14 ; 5882.66,2100.66 cw(c5920.03,2063.28) Y1.2@5920.03,2116.14 ; 5884.63,2102.63 ccw(c5845.09,2142.17) Y1.2@5901,2142.17 ; 5884.63,2102.63 ccw(c5845.09,2142.17) Y1.2@5901,2142.17 ; 5884.63,2102.63 ccw(c5845.09,2142.17) Y1.2@5901,2142.17 ; 5894.61,2112.61 cw(c5920.03,2087.18) Y1.2@5920.03,2123.14 ; 5894.61,2112.61 cw(c5920.03,2087.18) Y1.2@5920.03,2123.14 ; 5894.61,2112.61 cw(c5920.03,2087.18) Y1.2@5920.03,2123.14 ; Y1.2@5896.58,2114.58 ccw(c5868.99,2142.17) Y1.2@5908,2142.17 ; Y1.2@5896.58,2114.58 ccw(c5868.99,2142.17) Y1.2@5908,2142.17 ; Y1.2@5896.58,2114.58 ccw(c5868.99,2142.17) Y1.2@5908,2142.17
XRSTJ: C71.1 R74.1 U7.40 | length 918.6
  Top Layer w10: R74.1@5121.56,2004.56 U7.40@5306.42,2004.56 ; R74.1@5146.39,2012.49 ccw(c5165.53,2031.62) 5165.53,2004.56 ; R74.1@5146.39,2012.49 ccw(c5165.53,2031.62) 5165.53,2004.56 ; R74.1@5146.39,2012.49 ccw(c5165.53,2031.62) 5165.53,2004.56 ; R74.1@5153.47,1990.44 cw(c5187.56,1956.34) 5187.56,2004.56 ; R74.1@5153.47,1990.44 cw(c5187.56,1956.34) 5187.56,2004.56 ; R74.1@5153.47,1990.44 cw(c5187.56,1956.34) 5187.56,2004.56 ; R74.1@5153.47,2019.56 ccw(c5189.67,2055.76) 5189.67,2004.56 ; R74.1@5153.47,2019.56 ccw(c5189.67,2055.76) 5189.67,2004.56 ; R74.1@5153.47,2019.56 ccw(c5189.67,2055.76) 5189.67,2004.56
  Top Layer w20: R74.1@5138.91,2005 C71.1@5138.91,2086 ; R74.1@5127.88,2017.01 ccw(c5101.27,2043.62) 5138.91,2043.62 ; R74.1@5127.88,2017.01 ccw(c5101.27,2043.62) 5138.91,2043.62 ; R74.1@5127.88,2017.01 ccw(c5101.27,2043.62) 5138.91,2043.62 ; C71.1@5127.88,2073.99 cw(c5101.27,2047.38) 5138.91,2047.38 ; C71.1@5127.88,2073.99 cw(c5101.27,2047.38) 5138.91,2047.38 ; C71.1@5127.88,2073.99 cw(c5101.27,2047.38) 5138.91,2047.38 ; 5138.91,2043.62 ccw(c5176.54,2043.62) R74.1@5149.93,2017.01 ; 5138.91,2043.62 ccw(c5176.54,2043.62) R74.1@5149.93,2017.01 ; 5138.91,2043.62 ccw(c5176.54,2043.62) R74.1@5149.93,2017.01 ; 5138.91,2047.38 cw(c5176.54,2047.38) C71.1@5149.93,2073.99 ; 5138.91,2047.38 cw(c5176.54,2047.38) C71.1@5149.93,2073.99 ; 5138.91,2047.38 cw(c5176.54,2047.38) C71.1@5149.93,2073.99
pads on no net: ?.1@6619,384 ?.1@6619,3921.26 BATTERY.0 E29.1@3320,3640 E29.2@3320,3390 E30.1@3300,4240 E30.2@3300,3990 J6.0 JP44.2 JP44.3 JP44.4 JP44.14 JP44.15 JP44.22 JP44.31 mini-USB.4 SD_CARD.16 SD_CARD.17 U7.44 U24.11 U24.12 U24.13 U24.14

## Polygon pours and split planes (outlines as drawn)
GND on Bottom Layer "Bottom Layer-No Net" (solid, remove dead copper, pour order 1000): 447.65,4533.26 440.65,4526.26 440.65,21.26 6944.65,21.26 6964.65,41.26 6943.65,62.26 6943.65,4533.26
GND on Top Layer "Bottom Layer-No Net" (solid, remove dead copper, pour order 1001): 466.65,4486.47 466.65,3.47 476.65,-6.53 486.65,-16.53 6960.65,-16.53 6960.65,4457.47 6969.65,4466.47

## Keep-outs
Keep-Out Layer:
  lines w5: 1,2274 1,3155 ; 3,3214 3,3624 ; 3.8,2220 319,2220 319,2275 3.8,2275 ; 3.8,3155 319,3155 319,3215 3.8,3215 ; 3.8,3625 319,3625 319,3681 4,3681 4,3984.8 3.8,3985 ; 4,2219.8 4,515 ccw(c48.72,515) 48.72,470.28 ; 4.28,3985.28 cw(c49,3985.28) 49,4030 379,4030 ; 49,470 378.8,470 378.8,45 ; 378.8,4030 378.8,4455 ; 379,45 ccw(c423.72,45) 423.72,0.28 ; 379,4455 cw(c423.72,4455) 423.72,4499.72 ; 424,0 6879,0 ; 424,4500 6879,4500 6879,1

## Other copper
Top Layer:
  rectangle net GND: 1117,3844 1161,4002
  rectangle net GND: 1056,3900 1223,3933
  rectangle net GND: 2145,818 2191,876
  rectangle net GND: 2370,4095 2454,4127
  rectangle net GND: 2386,3438 2440,3471
  rectangle net DC5V: 5254,1549 5428,1595
  rectangle net DC5V: 5194,1462 5271,1583
  rectangle net DC5V_I: 5537,3374 5625,4390
  rectangle net GND: 5756,3436.6 5859,3464
  region net GND: 4318,1726 4318,1736 4113,1736 4113,1726
  region net GND: 4320,2179 4320,2189 4197,2189 4197,2179
  region net GND: 4318,2277 4318,2287 4215,2287 4215,2277
  region net GND: 4143,2337 4143,2346 4069,2346 4069,2337
  region net DC5V: 5627,3006 5627,3220 5535,3220 5535,3006
  region net DC5V_I: 5625,4293 5625,4393 4033,4393 4033,4293
  region net VDD3_3: 4914,2848 4914,3122 4876,3122 4876,2848
  region net VDD3_3: 5219.46,2509 5219.46,2548 4521,2548 4521,2509
  region net VDD3_3: 4912,3803 4912,3850 3906,3850 3906,3803
  region net VDD3_3: 4913,3090 4913,3841 4876,3841 4876,3090
  region net VCC: 4101,3260 4101,3379 3583,3379 3583,3260
  region net VCC: 4341,1610 4341,1700 3211,1700 3211,1610
  region net VCC: 4341,1697 4341,1717 4282,1717 4282,1697
  region net VCC: 4146,1694 4146,1714 4074,1714 4074,1694
  region net VDD3_3: 4916,484 4916,2871 4876,2871 4876,484
  region net VDD3_3: 4916,471 4916,520 4012,520 4012,471
  region net VDD3_3: 791,818 791,871 562,871 562,818
  region net VCC: 4102,2887 4102,3377 4009,3377 4009,2887
  rectangle net GND: 6552,1764 6570,1895
  rectangle net GND: 6227,2341 6697,2360
  rectangle net GND: 6551,2293 6578,2530
  rectangle net GND: 6331,2296 6353,2523
  rectangle net GND: 6237,2459 6673,2479
  rectangle net GND: 6241,2977 6665,2990
  rectangle net GND: 6560,2926 6571,3050
  rectangle net GND: 6336,2996 6350,3060
  rectangle net GND: 6329,3098 6399,3117
  rectangle net GND: 6326,3704 6402,3720
  rectangle net GND: 6401,3640 6415,3794
  rectangle net GND: 6512,614 6847,628
  rectangle net GND: 6517,914 6845,929
  rectangle net DC12_L: 2295,3730 2441,4000
  rectangle net DC12_L: 2290,3225 2438,3336
  rectangle net GND: 5293,2833 5313,2881
  region net GND: 4186,2199 4186,2209 4097,2209 4097,2199
  rectangle net GND: 4190,2178 4201,2209
  rectangle net GND: 2657,3226 2807,3367
  rectangle net GND: 4146,2790 4321,3038
  rectangle net GND: 2145,740 2192,852
Bottom Layer:
  rectangle net GND: 1056,3899 1243,3933
  rectangle net GND: 1117,3828 1166,4011
  region net DC5V: 5658,1549 5658,1597 5406,1597 5406,1549
  region net DC5V: 5658,1551 5658,2621 5610,2621 5610,1551
  region net DC5V: 5630,2542 5630,3055 5534,3055 5534,2542
  region net GND: 506.24,3840 506.24,3935 174,3935 174,3840
  region net VDD3_3: 4099,472 4099,513 900,513 900,472
  region net VCC: 3310,2957 3207,2957 3207,1611 3310,1611
  region net VCC: 4107,2887 4107,2979 3212,2979 3212,2887
  region net DC5V: 6801,2543 6801,2631 5569,2631 5569,2543
  region net DC5V: 6807,1200 6807,2621 6719,2621 6719,1200
  region net DC5V: 6795,1909 6795,1999 6222,1999 6222,1909
  region net DC5V: 6797,1199 6797,1284 6424,1284 6424,1199
  rectangle net GND: 6743,910 6778,993
  rectangle net DC12_L: 2291,3223 2440,3851
  rectangle net GND: 4151,2802 4316,3037
  rectangle net GND: 2661,3196 2813,3365
  region net GND: 5217,1531 5316,1630 5381,1629 5380,1578 5380,1523 5392,1523

## Silkscreen, mask and mechanical layers (free items; w line width, h text height)
Top Overlay:
  lines w3: 1048,466 1457.63,466 ; 1141,422 1141,510 ; 1254.05,422.05 1254.05,507.29 ; 1366,424 1366,510
  lines w5: -796,0 419,0 ; -336,470 114,470 ; -236,2250 304,2250 ; 4,-390 4,510 ; 212.11,118.11 6967,118.11 ; 338.83,4381.89 6875,4381.89 ; 1048,507.29 1048,425.5 1051.5,422 1454.13,422 1457.63,425.5 1457.63,505.08 1455.42,507.29 ; 1254,422 1254.05,422.05 ; 1366,424 1368,422 ; 3142,4111 3455,4111 ; 3158,4078 3270,3965 ; 3161,3517 3476,3517 ; 3175.5,4107.5 3319.5,3963.5 ; 3177,3484 3294,3365 ; 3194.5,3513.5 3343,3365 ; 3233,4110 3363.23,3978.25 ; 3252,3516 3387.23,3379.2 ; 3285.5,4112.5 3399.5,3998.5 ; 3304.5,3518.5 3420,3403 ; 3350.5,4110.5 3429,4032 ; 3369.5,3516.5 3449.5,3436.5 ; 3788,3938 4064,3938 ; 3804,3990 3855.5,3938.5 ; 3831,4026 3920.5,3936.5 ; 3861.64,4051.66 3973,3939 ; 3905,4067 4030.5,3941.5 ; 3952,4066 4048,3971 ; 3953,3249 4011,3191 ; 3970.5,3278.5 4055,3194 ; 4033,3275 4114,3194 ; 4087.5,3276.5 4170,3194 ; 4152,3275 4185,3242 ; 4366,3839 4366,4215 4409,4258 5308,4258 5349,4217 5349,3837 ; 5663,4017 5721,4075 ; 5666,3858 5748.5,3940.5 ; 5666,3914 5747,3995 ; 5666,3973 5750.5,4057.5 ; 5714,3843 5747,3876 ; 6189,1836 6189,2350 ; 6189,2470 6189,2983
  lines w10: 5830.88,3409.05 cw(c5831.5,3410.5) 5831,3409 ; 5850.88,3433.05 cw(c5851.5,3434.5) 5851,3433
  text "-" at 1240,3887 h200 r270
  text "+" at 1250,3674 h200 r270
  text "5A" at 1028,3500 h59.06
  text "GND" at 1045,3083 h60 r270
  text "GPI6" at 1360,3083 h60 r270
  text "ADC1" at 1438,3083 h60 r270
  text "ADC3" at 1519,3083 h60 r270
  text "GPI8" at 1591,3083 h60 r270
  text "GPI10" at 1671,3083 h60 r270
  text "RX_DEBUG" at 1912,3083 h60 r270
  text "TX_DEBUG" at 1980,3083 h60 r270
  text "GPIO11" at 2539,3083 h60 r270
  text "GPIO12" at 2620,3083 h60 r270
  text "SPI_CS7" at 2773,3083 h60 r270
  text "SPI_MISO" at 2854,3083 h60 r270
  text "SPI_CLK" at 3016,3083 h60 r270
  text "SPI_MOSI" at 3095,3083 h60 r270
  text "SPI_CS5" at 3166,3083 h60 r270
  text "SPI_CS6" at 3246,3083 h60 r270
  text "TMS" at 3332,3083 h60 r270
  text "160227" at 4191,1908 h60 r270
  text "LED1" at 582,1379 h60 r270
  text "STU" at 672,1373 h60 r270
  text "LS" at 764,1361 h60 r270
  text "USBD_VBUS" at 3487,1340 h60 r270
  text "ECDP_DN" at 3171,1269.68 h60 r270
  text "USBD_DN" at 3328,1269.74 h60 r270
  text "ECDP_DP" at 3089,1268.81 h60 r270
  text "USBD_DP" at 3413,1268.86 h60 r270
  text "GPS_PPS" at 1905,1266.88 h60 r270
  text "GPS_TX" at 1991,1230.49 h60 r270
  text "NTRST" at 1833,1197 h60 r270
  text "DTR_1" at 2069,1187 h60 r270
  text "RXD_1" at 2150,1185 h60 r270
  text "CTS_1" at 2462.99,1185 h60 r270
  text "RTS_1" at 2304.99,1184 h60 r270
  text "DCD_1" at 2382.99,1184 h60 r270
  text "TXD_1" at 2230,1183 h60 r270
  text "GPO4" at 2539,1165.61 h60 r270
  text "GPO3" at 2620,1165.73 h60 r270
  text "GPO2" at 2702,1165.38 h60 r270
  text "GPO1" at 2778,1158.36 h60 r270
  text "TDO" at 1756,1134.05 h60 r270
  text "RST" at 2937,1122 h60 r270
  text "STATUS" at 6378,1077 h60 r270
  text "GPI7" at 1601,893 h60 r270
  text "GPI9" at 1680,892 h60 r270
  text "I2_SCL" at 1443,888 h60 r270
  text "GND" at 1119,887.43 h60 r270
  text "+5V" at 1275,887.43 h60 r270
  text "I2_SDA" at 1364,887 h60 r270
  text "GND" at 1204,885 h60 r270
  text "GPI5" at 1520,885 h60 r270
  text "3.3V" at 1045,884 h60 r270
  text "+" at 6224,781 h59.06
  text "3.3V" at 1053,473.37 h45
  text "MISO" at 1151,473 h45
  text "MOSI" at 1260,473 h45
  text "CS6" at 1376,473 h45
  text "LED6" at 4011,439 h60 r270
  text "LED5" at 4112,439 h60 r270
  text "LED4" at 4212.36,439 h60 r270
  text "LINK" at 4313.36,439 h60 r270
  text "SPD" at 4415,439 h60 r270
  text "GND" at 1053,431 h45
  text "CS7" at 1160,431 h45
  text "CLK" at 1265,431 h45
  text "CS5" at 1378,431 h45
  text "RX_DEBUG" at 885,283 h39.37 r270
  text "TX_DEBUG" at 992,281 h39.37 r270
  text "+5V" at 1642,278 h78.74 r270
  text "GND" at 1742,278 h78.74 r270
  text "GND" at 1077,276 h78.74 r270
  text "SCL" at 1941,276 h78.74 r270
  text "SDA" at 1841,274 h78.74 r270
  text "RX" at 2641,200 h80
  text "TX" at 2514,197 h80
  text "GND" at 2777,197 h80
  text "VSign Master-C" at 5040,132 h118.11
  text "RXD_1" at 1331.74,-1111 h60 r270
  text "TXD_1" at 1408.99,-1112 h60 r270
Top Paste:
  rectangle: 1762,3891 2183,4339
  rectangle: 1766,3241 2160,3671
  rectangle: 1769,3240 2171,3675
Top Solder:
  rectangle: 1759,3880 2188,4353
  rectangle: 1763,3226 2173,3679

## Text inside footprints (layer, text, board x,y; h text height)
CB1: Top Overlay "+" at 1375,3875 h30 r90
E29: Top Overlay "+" at 3409,3680 h30 r270
E30: Top Overlay "+" at 3383,4281 h30 r270